# EAGLE board keyboard_adc (EAGLE 5.11)
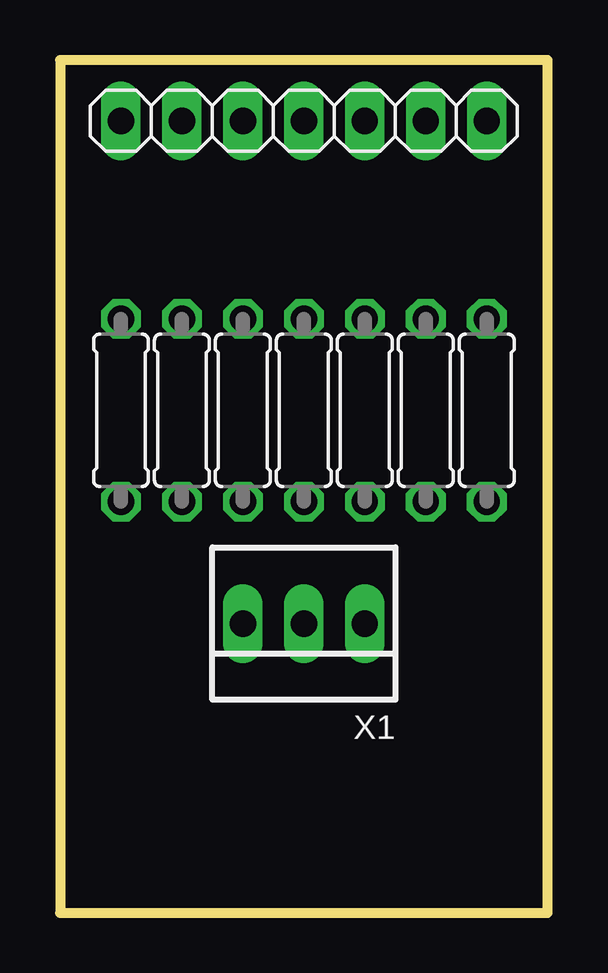
[diagram p0: board, top side]
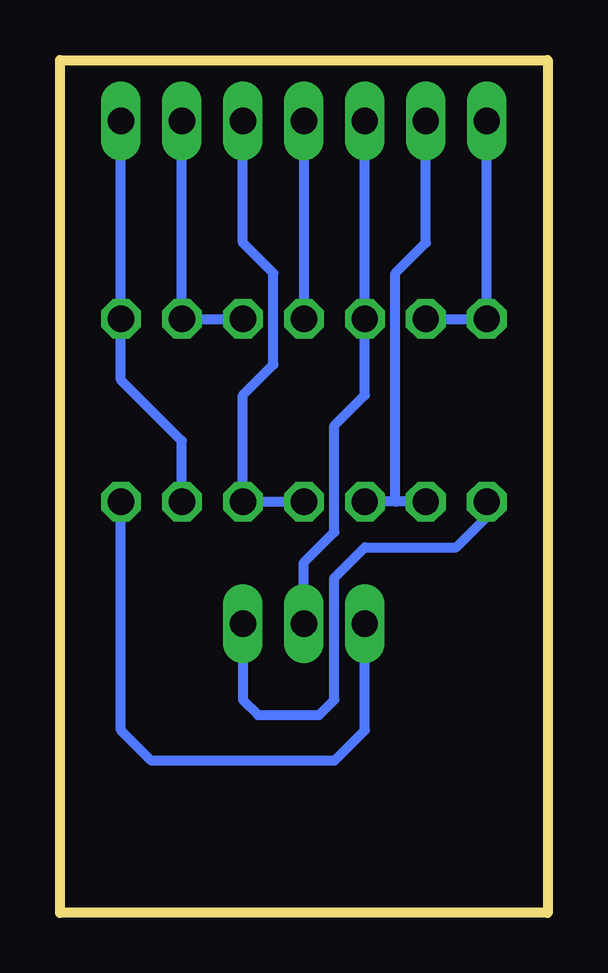
[diagram p1: board, bottom side, seen from below]

Size 20.32 x 35.56 mm. Coordinates in mm from the lower left corner, seen from the top.
Outline: 20.32,35.56 0,35.56 0,0 20.32,0 20.32,35.56
Copper layers (1*16): Top 0.035mm / dielectric 1.5mm / Bottom 0.035mm
Design rules "default": minimum track width 10mil, minimum drill 24mil, track to track 8mil, track to pad 8mil, pad to pad 8mil, via to via 8mil, smd to smd 8mil, copper to edge 40mil, drill to drill 8mil, minimum pad ring 10mil, minimum via ring 8mil, stop-mask expansion 4mil, vias tented up to drill 0mil, thermal gap 10mil

## Footprints (pad centres in the part's own frame; a part is rotated, then mirrored left to right if it is on the bottom)
1X01 = drill 1.1 long: 1 0,0
0207/7 = drill 1.1 octagon: 1 -3.81,0; 2 3.81,0
22-23-2031 = drill 1.1 long: 1 -2.54,0; 2 0,0; 3 2.54,0

## Placement (x,y rotation side)
JP2  L4  [1X01]  17.78,33.02 180 top
JP3  L3  [1X01]  15.24,33.02 180 top
JP4  L2  [1X01]  12.7,33.02 180 top
JP5  L1  [1X01]  10.16,33.02 180 top
JP6  C3  [1X01]  7.62,33.02 180 top
JP7  C2  [1X01]  5.08,33.02 180 top
JP8  C1  [1X01]  2.54,33.02 180 top
R1  180  [0207/7]  17.78,20.95 90 top
R2  680  [0207/7]  15.24,20.95 90 top
R3  3k3  [0207/7]  12.7,20.95 270 top
R4  15k  [0207/7]  10.16,20.95 270 top
R5  1k  [0207/7]  7.62,20.95 270 top
R6  820  [0207/7]  5.08,20.95 90 top
R7  1k  [0207/7]  2.54,20.95 270 top
X1  [22-23-2031]  10.16,12.06 180 top

## Library data of the parts
JP2-JP8 R1-R7 X1 = keyboard_adc

## Nets
+5V: R1.1 X1.3
ADC: JP6.1 R5.1 X1.2
GND: R7.2 X1.1
N$2: JP2.1 R1.2 R2.1
N$3: JP3.1 R2.2 R3.1
N$4: JP4.1 R3.2 R4.2
N$5: JP5.1 R4.1
N$7: JP8.1 R6.2 R7.1
N$8: JP7.1 R5.2 R6.1

## Tracks (layer width: path | path; a pad name or v marks a point on that pad's centre or on a via)
+5V
  Bottom 0.406: R1.1 17.78,7.62 16.51,6.35 8.89,6.35 7.62,7.62 X1.3
ADC
  Bottom 0.406: JP6.1 R5.1 7.62,21.59 8.89,20.32 8.89,15.88 10.16,14.61 X1.2
GND
  Bottom 0.406: X1.1 12.7,8.89 12.06,8.26 9.53,8.26 8.89,8.89 8.89,13.97 7.62,15.24 3.81,15.24 2.54,16.51 R7.2
N$2
  Bottom 0.406: JP2.1 R1.2 17.78,22.23 15.24,19.68 R2.1
N$3
  Bottom 0.406: JP3.1 R2.2 R3.1
N$4
  Bottom 0.406: JP4.1 12.7,27.94 11.43,26.67 11.43,22.86 12.7,21.59 R3.2 R4.2
N$5
  Bottom 0.406: JP5.1 R4.1
N$7
  Bottom 0.406: JP8.1 R7.1 R6.2
N$8
  Bottom 0.406: R6.1 6.35,17.14 | 6.35,17.14 R5.2 | JP7.1 5.08,27.94 6.35,26.67 6.35,17.14